# EAGLE board ATtiny (EAGLE 9.5.1)
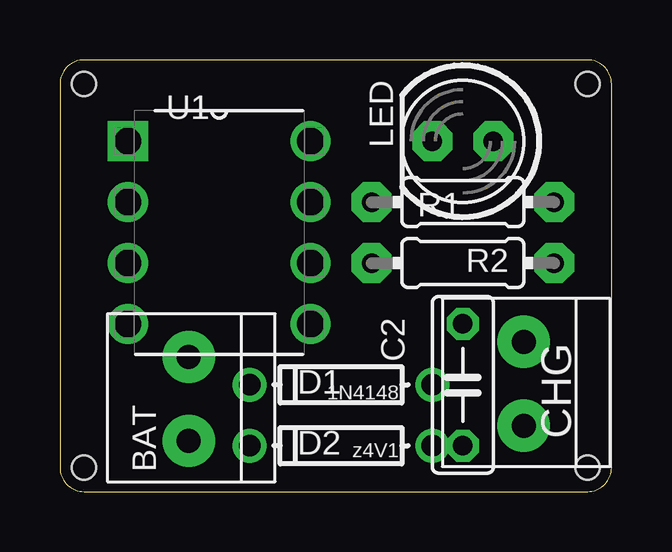
[diagram p0: board, top side]
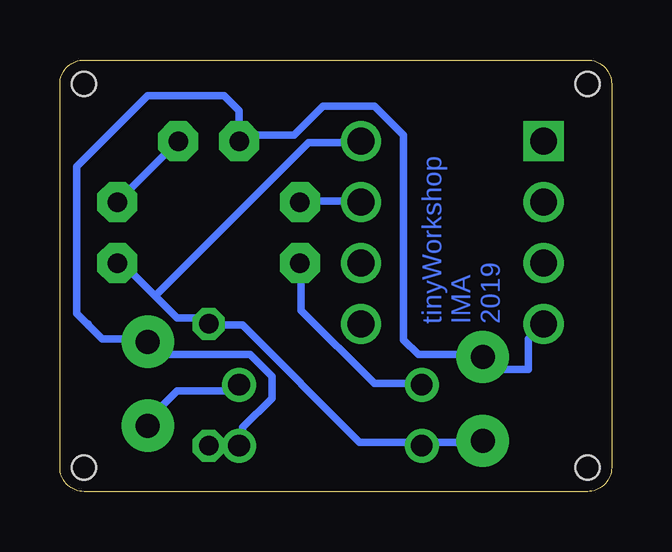
[diagram p1: board, bottom side, seen from below]

Size 23 x 18 mm. Coordinates in mm from the lower left corner, seen from the top.
Outline: 0,17 0,1 arc90 1,0 22,0 arc90 23,1 23,17 arc90 22,18 1,18 arc90 0,17
Copper layers (1*16): Top 0.035mm / dielectric 1.5mm / Bottom 0.035mm
Design rules "default *": minimum track width 12mil, minimum drill 0.7mm, track to track 12mil, track to pad 12mil, pad to pad 12mil, via to via 12mil, smd to smd 6mil, copper to edge 40mil, drill to drill 12mil, minimum pad ring 10mil, minimum via ring 8mil, stop-mask expansion 4mil, vias tented up to drill 0mil, thermal gap 10mil
Holes 1 mm at 1,17 22,17 22,1 1,1

## Footprints (pad centres in the part's own frame; a part is rotated, then mirrored left to right if it is on the bottom)
1X2-3.5MM = drill 1 pad 2.184: 1 1.8,0; 2 -1.7,0
C050-025X075 = drill 0.813 octagon: 1 -2.54,0; 2 2.54,0
DO-1N4148 = drill 0.9: A -3.81,0; C 3.81,0
LED5MM = drill 0.813 pad 1.676 octagon: A -1.27,0; K 1.27,0
0204/7 = drill 0.813 pad 1.676 octagon: 1 -3.81,0; 2 3.81,0
DIP254P762X533-8 = drill 1.118 square: 1 -7.62,7.62 | drill 1.118: 2 -7.62,5.08; 3 -7.62,2.54; 4 -7.62,0; 5 0,0; 6 0,2.54; 7 0,5.08; 8 0,7.62

## Placement (x,y rotation side)
BAT  1X2-3.5MM  [1X2-3.5MM]  5.37,3.81 90 top
C2  100nF  [C050-025X075]  16.8,4.45 270 top
CHG  1X2-3.5MM  [1X2-3.5MM]  19.34,4.45 90 top
D1  1N4148  [DO-1N4148]  11.72,4.45 180 top
D2  z4V1  [DO-1N4148]  11.72,1.91 180 top
LED  [LED5MM]  16.8,14.61 180 top
R1  1k  [0204/7]  16.8,12.07 0 top
R2  1k  [0204/7]  16.8,9.53 0 top
U1  ATTINY85-20PU  [DIP254P762X533-8]  10.45,6.99 0 top

## Library data of the parts
BAT C2 CHG D1 D2 LED R1 R2 = adafruit
U1 = ATTINY85-20PU; AVAILABILITY: Unavailable; DESCRIPTION: ATtiny Series 20 MHz 8 KB Flash 512 B SRAM 8-Bit Microcontroller - DIP-8; MF: Microchip; MP: ATTINY85-20PU; PACKAGE: DIP-8 Microchip; PRICE: None

## Nets
GND: BAT.1 C2.2 CHG.1 D2.A LED.K U1.4
N$1: R1.1 U1.7
N$2: LED.A R1.2
N$6: D1.C R2.1
V_BATT: BAT.2 C2.1 D2.C R2.2 U1.8
VCC: CHG.2 D1.A

## Tracks (layer width: path | path; a pad name or v marks a point on that pad's centre or on a via)
GND
  Bottom 0.305: U1.4 3.47,6.35 3.47,5.09 4.84,5.09 BAT.1 5.62,5.72 8.06,5.72 8.67,6.33 8.67,14.86 9.89,16.08 12.02,16.08 13.24,14.86 15.38,14.86 LED.K 15.53,15.88 16.16,16.52 19.34,16.52 21.74,14.12 21.83,14.02 22.31,13.54 22.31,7.42 21.83,6.94 | C2.2 16.6,2.06 15.68,2.06 D2.A 15.38,2.06 15.38,2.67 14.16,3.89 14.16,4.81 15.07,5.72 19.03,5.72 19.34,6.02 CHG.1 19.45,6.35 21.24,6.35 21.83,6.94 | 21.83,6.94 21.83,6.99
N$1
  Bottom 0.305: U1.7 10.5,12.12 12.94,12.12 R1.1
N$2
  Bottom 0.305: LED.A R1.2
N$6
  Bottom 0.305: D1.C 8.06,4.5 9.89,4.5 12.94,7.55 12.94,9.38 R2.1
V_BATT
  Bottom 0.305: BAT.2 5.62,2.06 7.76,2.06 D2.C 8.06,2.06 10.5,2.06 15.38,6.94 16.6,6.94 C2.1 16.9,7.24 18.12,7.24 19.03,8.16 | 19.03,8.16 20.56,9.68 R2.2 | 19.03,8.16 12.63,14.56 10.5,14.56 U1.8
VCC
  Bottom 0.305: D1.A 15.68,4.2 18.12,4.2 19.34,2.98 CHG.2

## Text on the board
Bottom: tinyWorkshop / IMA / 2019